# Altium PCB pcb.PcbDoc (part 1 of 2)
Units mil, origin at the board's own origin, x right, y up, seen from the top; angles counter-clockwise.
Board outline 2362.2 x 2507.87 mil, 4 copper layers (Top Layer, Internal Plane 1, MidLayer1, Bottom Layer); 87 components, 150 nets, 729 pads, 361 vias.
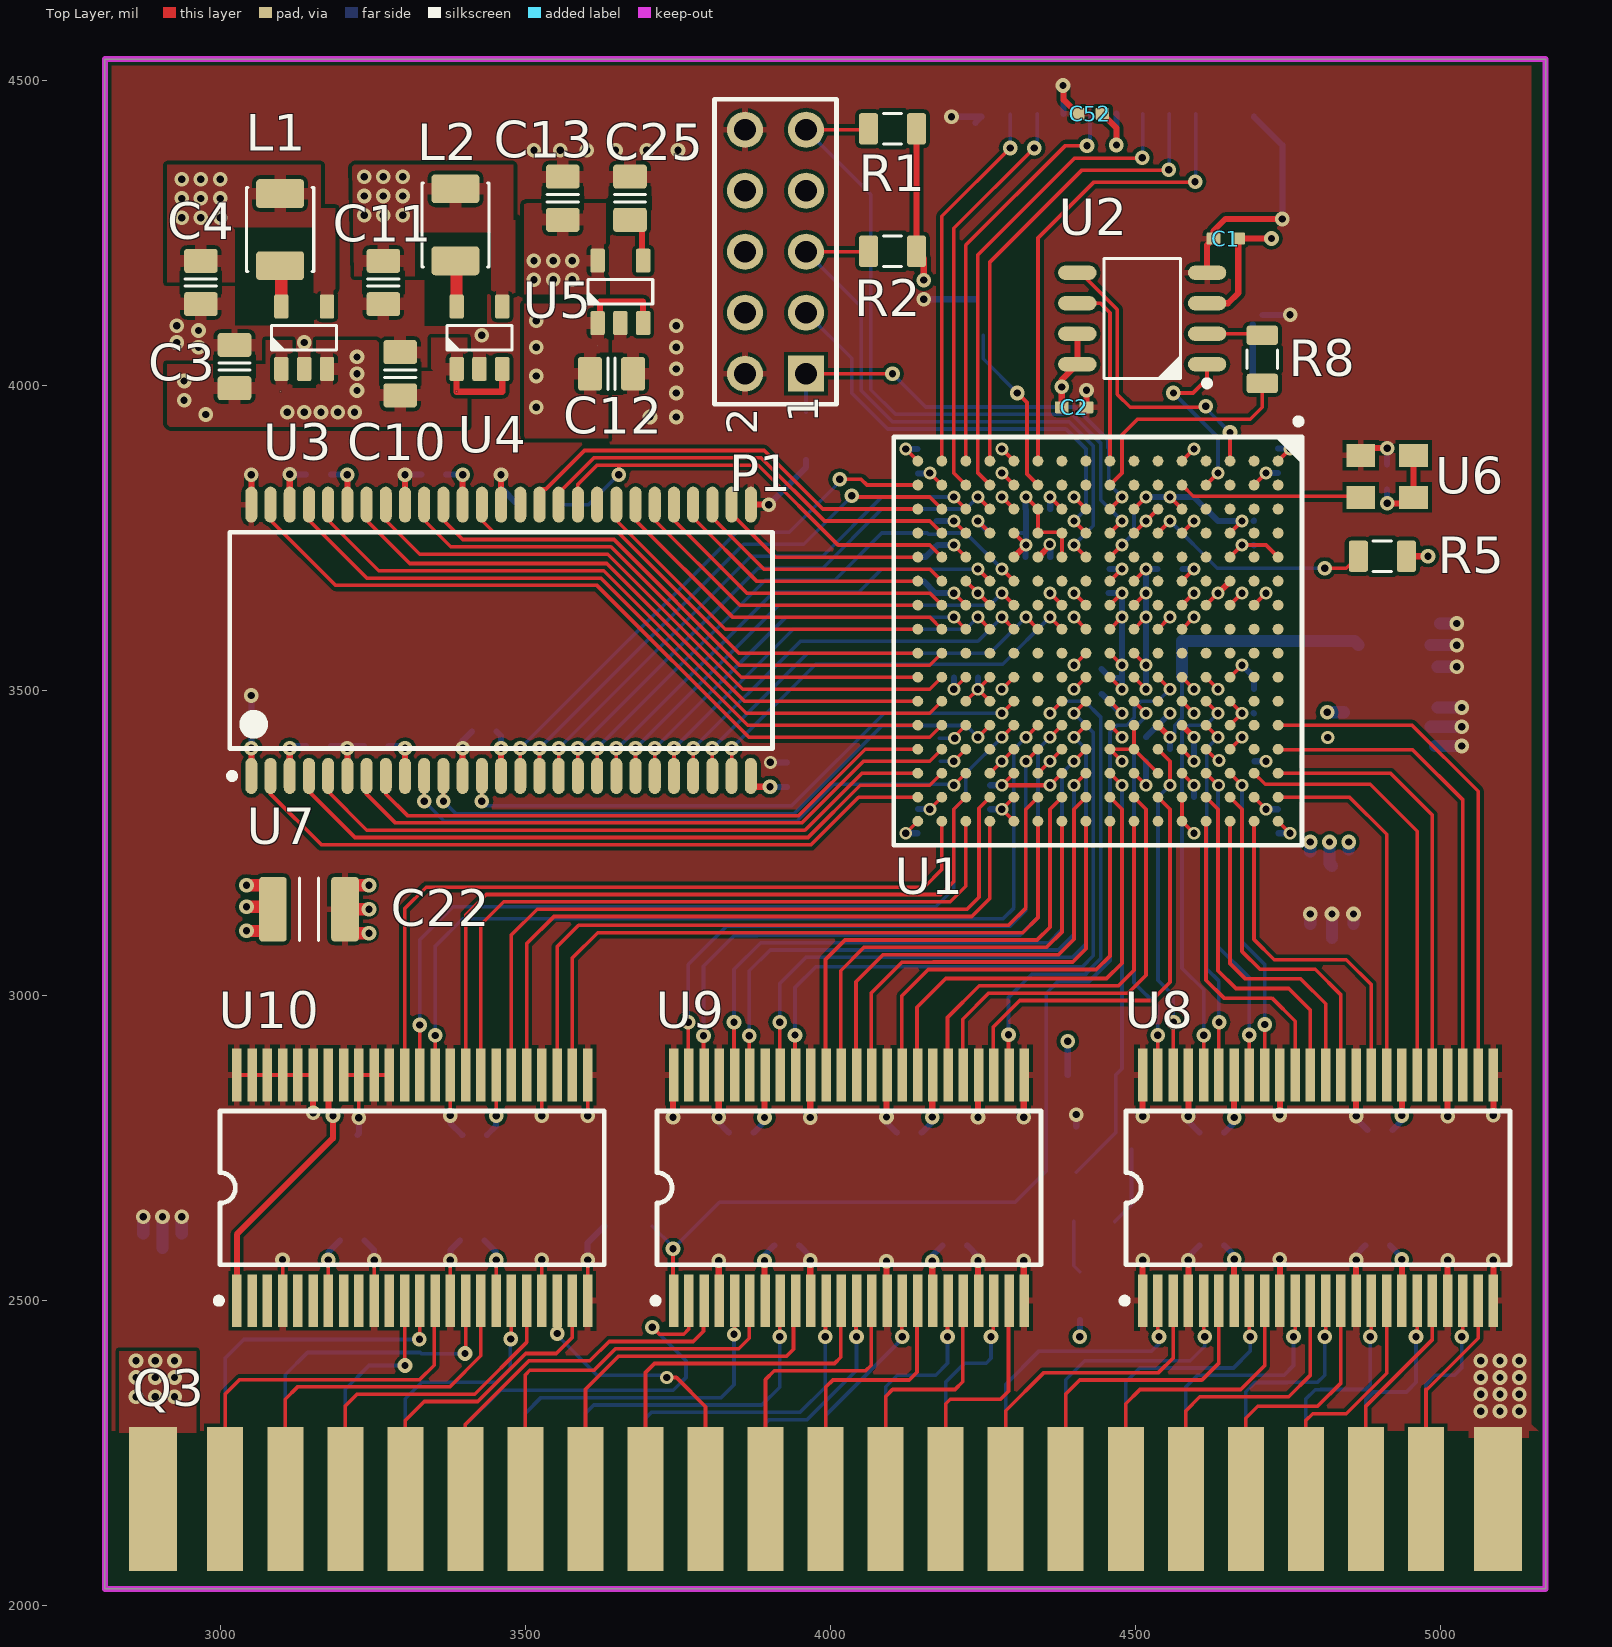
[diagram p0: Top Layer view]
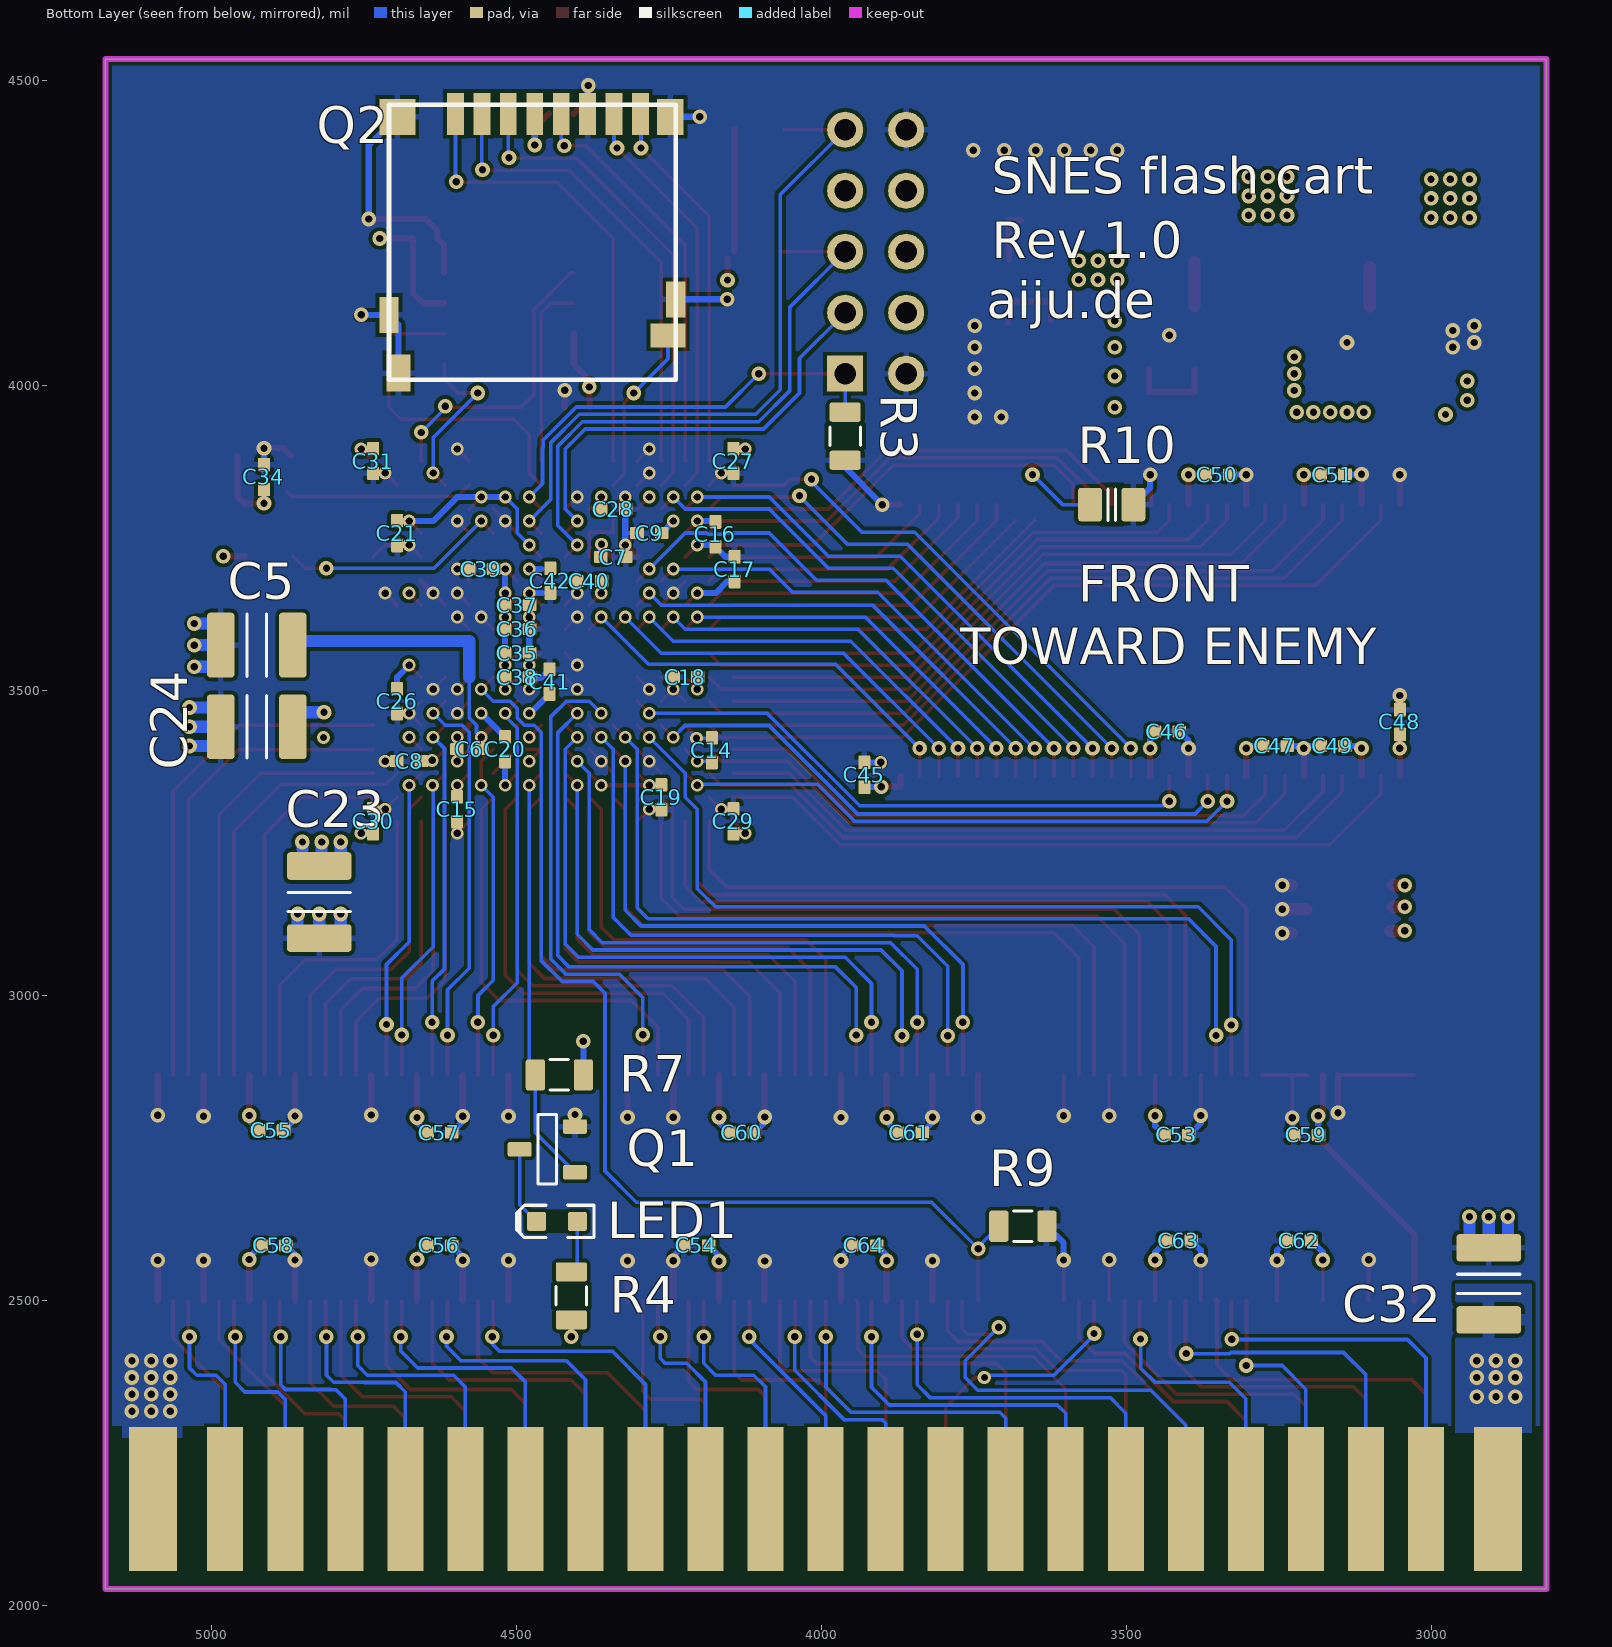
[diagram p1: Bottom Layer view, seen from below]
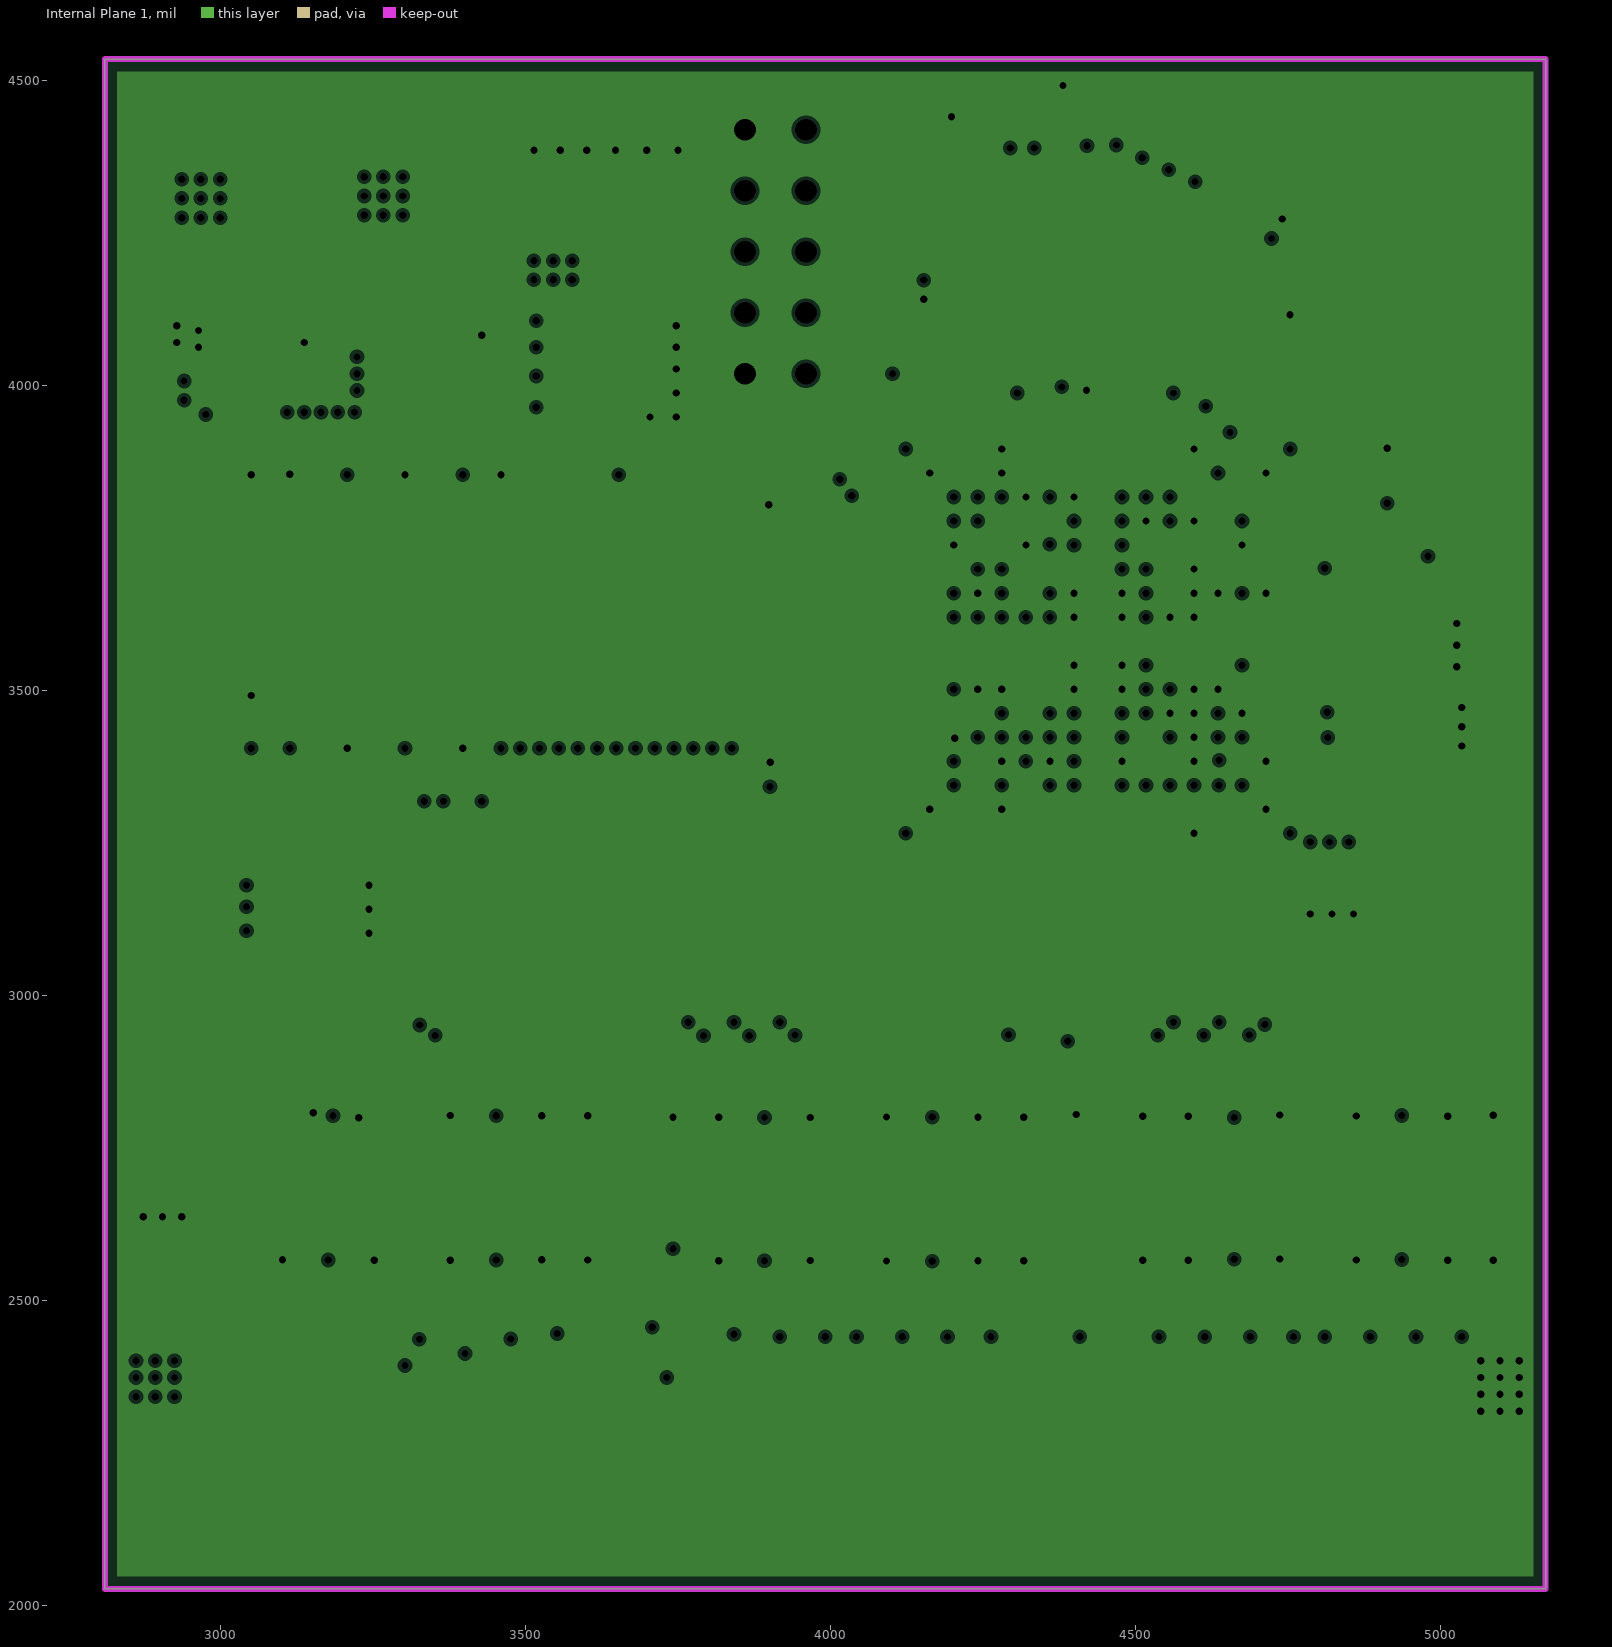
[diagram p2: Internal Plane 1, clearances drawn from the general rule]
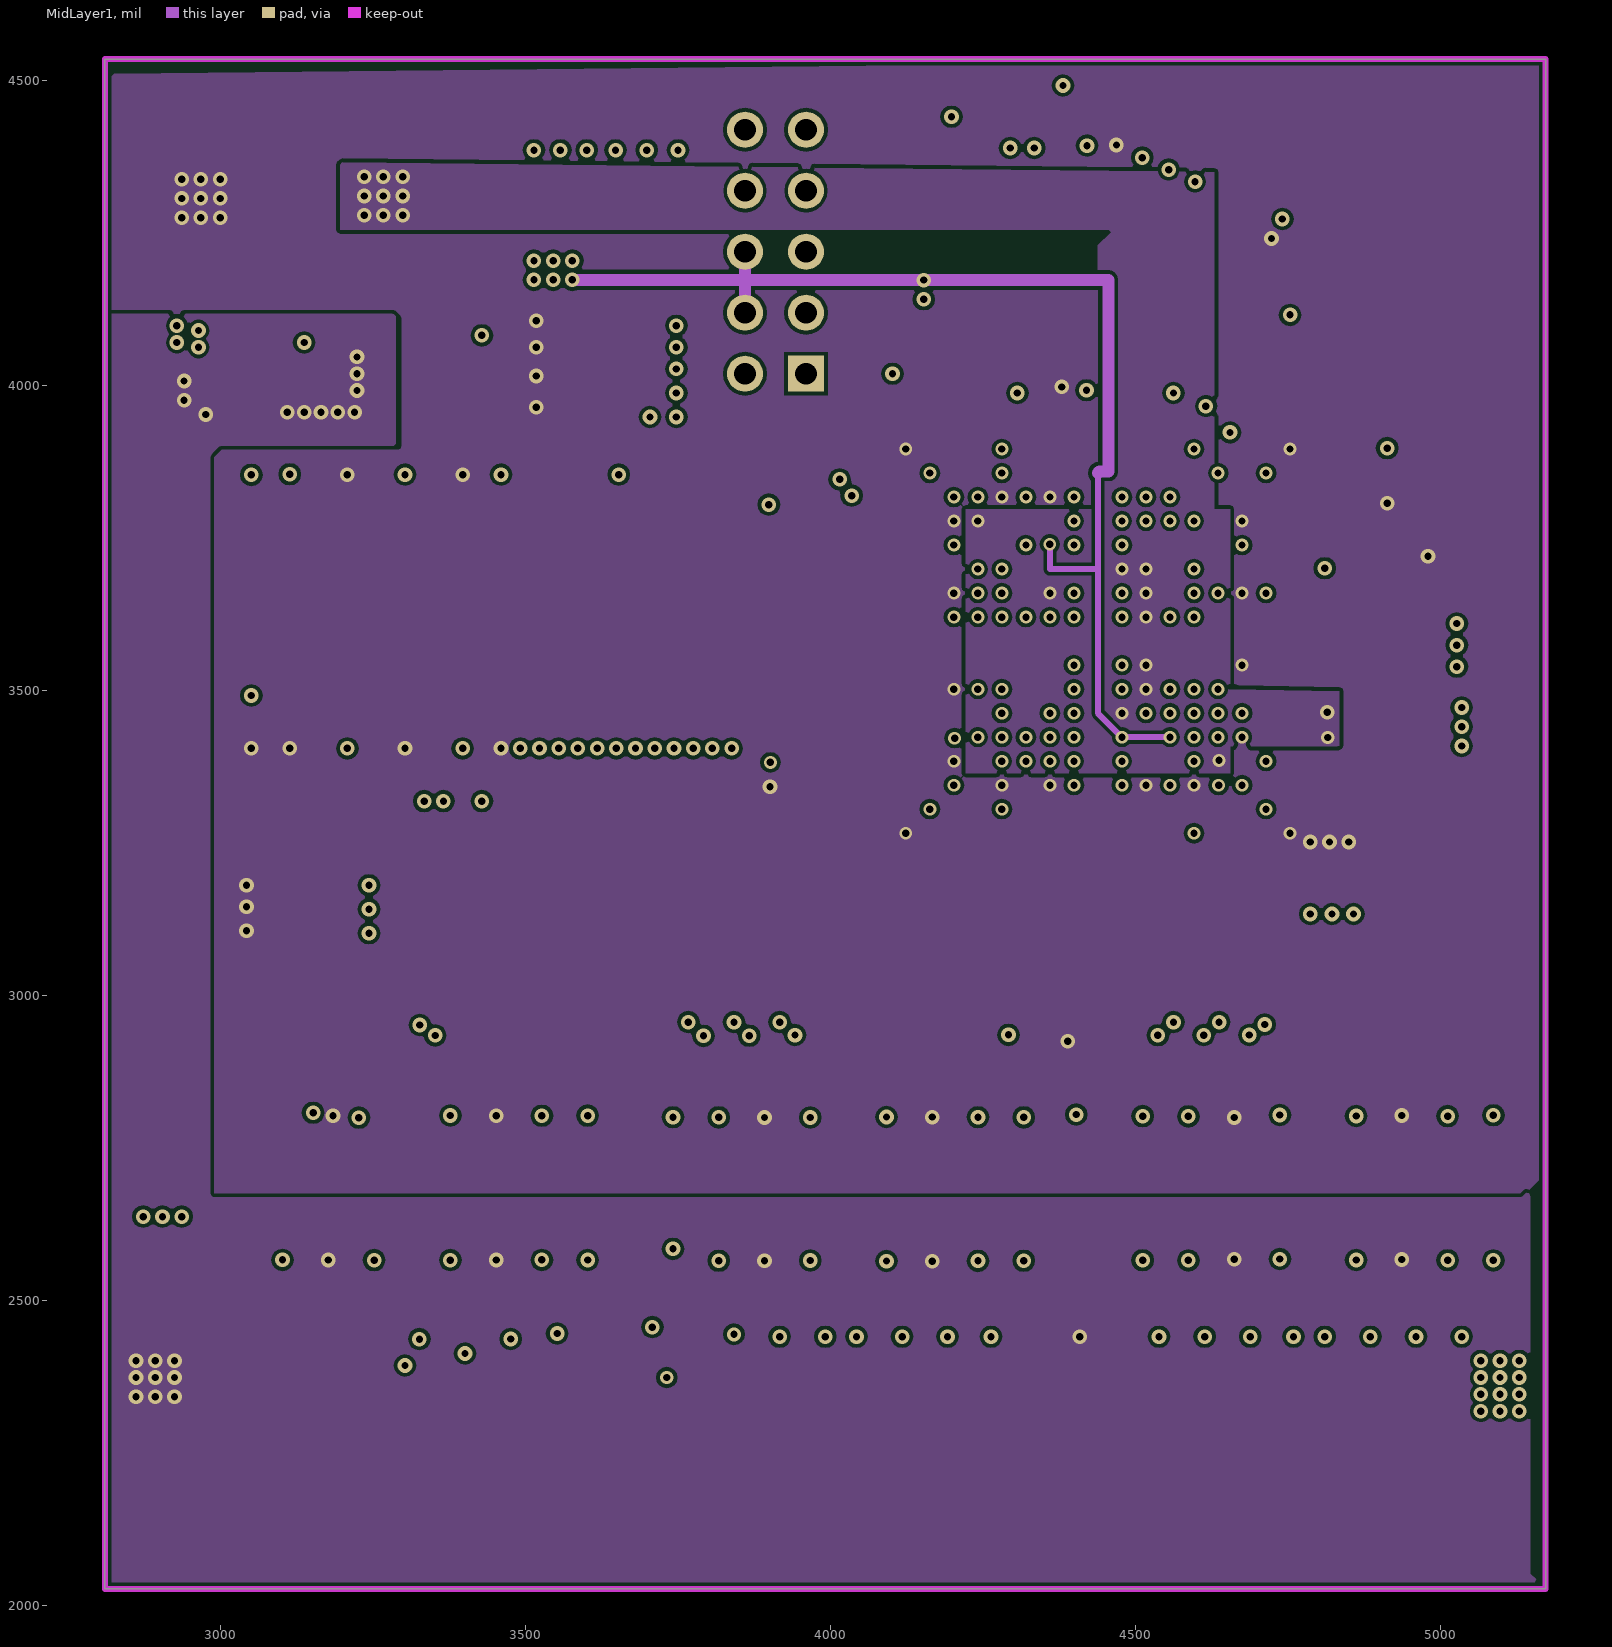
[diagram p3: MidLayer1]
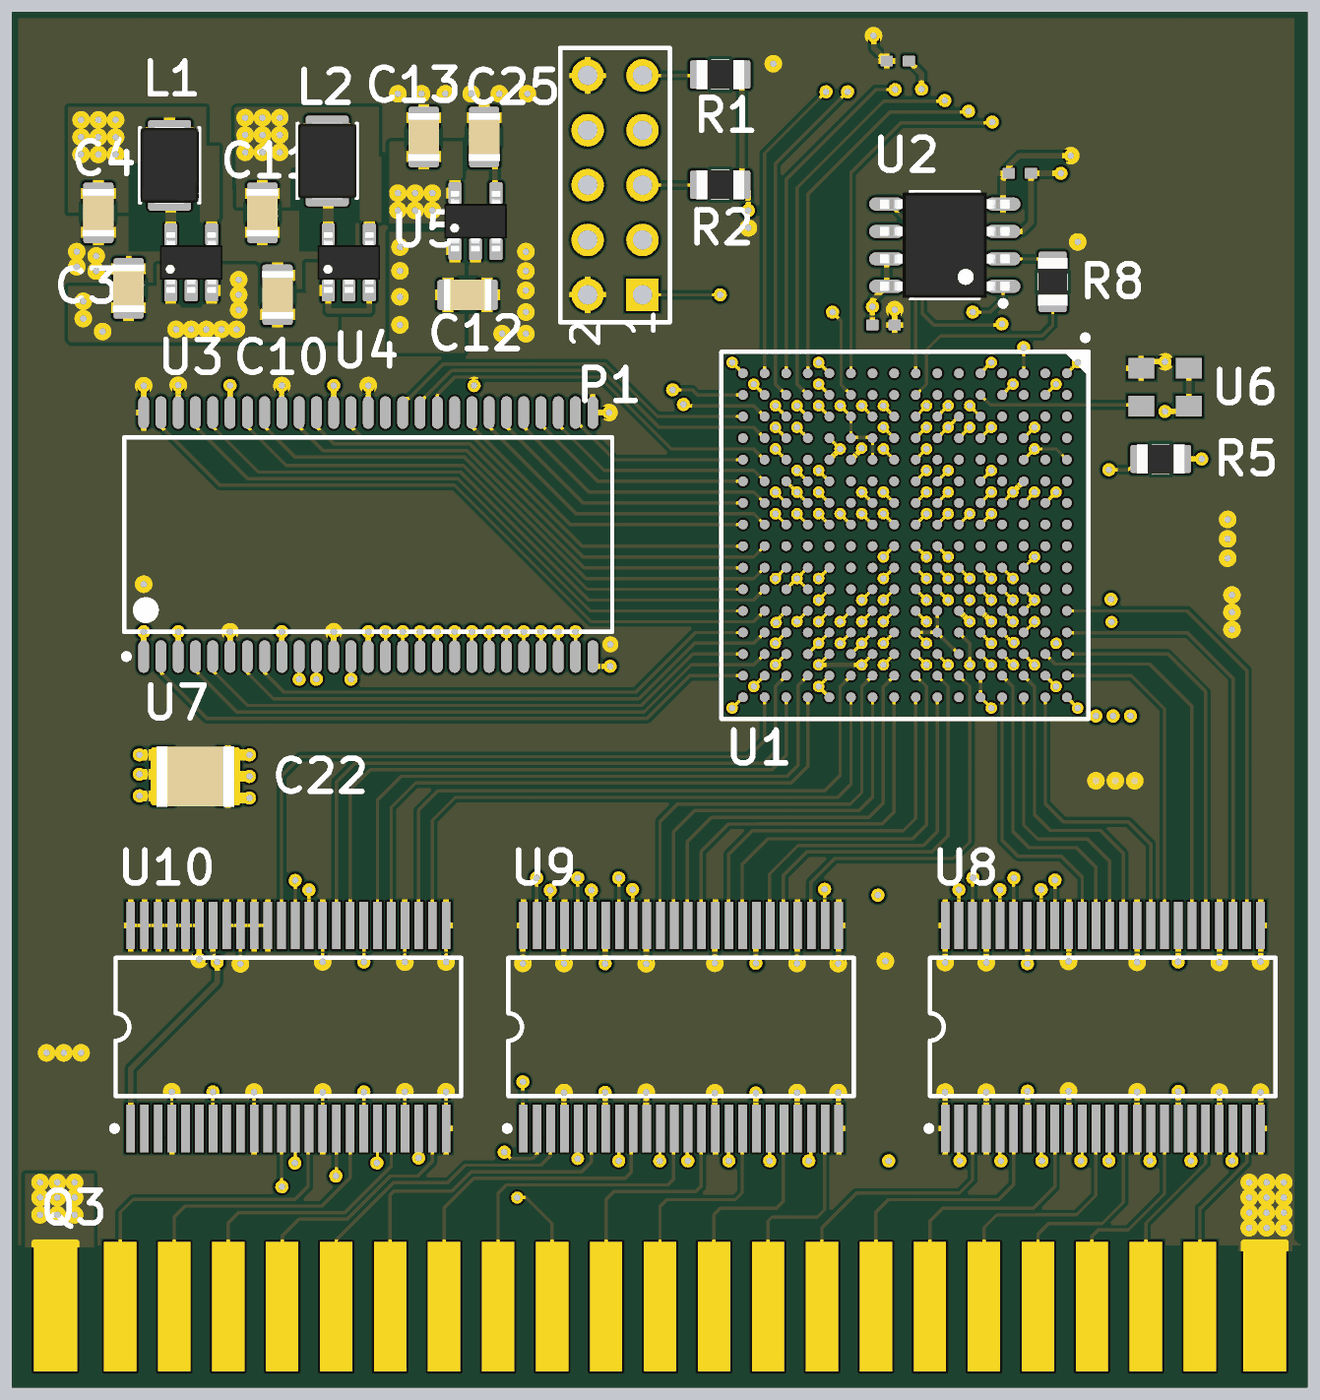
[diagram p5: 3D render of the assembled board from above, using the file's embedded part models]

## Layer stack, top to bottom
Top Layer: signal copper 1.4
Dielectric: prepreg 12.6, FR-4, Dk 4.8
Internal Plane 1: plane copper 1.4, net GND
Dielectric: core 12.6, FR-4, Dk 4.8
MidLayer1: signal copper 1.4
Dielectric: prepreg 12.6, FR-4, Dk 4.8
Bottom Layer: signal copper 1.4

## Board outline
2811.02,2027.56 2811.02,4535.43 5173.23,4535.43 5173.23,2027.56

## Design rules (kind name [scope] priority, off if disabled: settings)
Clearance [All] p1: gap=6
HoleSize [All] p1: absolutevalues=TRUE maxlimit=250 minlimit=12 maxpercent=80.000 minpercent=20.000
MinimumAnnularRing [All] p1: minimumring=4
MinimumSolderMaskSliver [All] p1: minsoldermaskwidth=4
PlaneClearance [All] p1: clearance=6
PlaneConnect [All] p1: planeconnectstyle=Relief reliefexpansion=6 reliefentries=4 reliefconductorwidth=6 reliefairgap=6
PolygonConnect PolygonConnect_1 [All vs IsVia] p1: component=Q3 connectstyle=Direct reliefconductorwidth=10 reliefentries=4 polygonreliefangle="90 Angle" airgapwidth=10
PolygonConnect [All] p2: connectstyle=Relief reliefconductorwidth=10 reliefentries=4 polygonreliefangle="90 Angle" airgapwidth=6
RoutingVias [All] p1: holewidth=12 width=24 viastyle="Through Hole" minholewidth=12 minwidth=21 maxholewidth=12 maxwidth=24
SilkToSolderMaskClearance SilkscreenOverComponentPads [IsPad] p1: minsilkscreentomaskgap=10 clearancetoexposedcopper=TRUE
SolderMaskExpansion [IsVia] p1: expansion=-999
SolderMaskExpansion SolderMaskExpansion_2 [Component=U7] p2: component=U10 expansion=2
SolderMaskExpansion SolderMaskExpansion_1 [All] p3: expansion=4
Width [All] p1: maxlimit=20 minlimit=6 preferedwidth=6
23 further rules are at their usual default settings.

## Classes and differential pairs
component class snesio: C53 C54 C55 C56 C57 C58 C59 C60 C61 C62 C63 C64 Q3 R9 U8 U9 U10
component class power: C3 C4 C5 C6 C7 C8 C9 C10 C11 C12 C13 C14 C15 C16 C17 C18 C19 C20 C21 C22 C23 C24 C25 C26 C27 C28 C29 C30 C31 C32 C34 C35 C36 C37 C38 C39 C40 C41 C42 C45 C46 C47 C48 C49 C50 C51 L1 L2 U3 U4 U5 U6
component class mem: C52 Q2 R10 U7
component class conf: C1 C2 LED1 P1 Q1 R1 R2 R3 R4 R5 R7 R8 U1 U2

## Components (designator, comment, footprint, x,y, rotation, side; value= is the part's Value field where it differs from the comment)
C1 "" CAPC1005X06L#1 4648.9,4241.29 r0 top
C2 "" CAPC1005X06L#1 4400.21,3964.65 r180 top
C3 "JMK212BJ106KD-T" CAPC2012X135N 3023.62,4031.5 r270 top
C4 "JMK212BJ106KD-T" CAPC2012X135N 2968.5,4169.29 r90 top
C5 "Cap Pol2" CAPC3225X220N 4925.2,3574.8 r0 bottom
C6 "" CAPC1005X06L#1 4577.01,3404.13 r180 bottom
C7 "" CAPC1005X06L#1 4340.79,3719.1 r0 bottom
C8 "" CAPC1005X06L#1 4675.43,3384.45 r180 bottom
C9 "" CAPC1005X06L#1 4281.73,3758.46 r180 bottom
C10 "JMK212BJ106KD-T" CAPC2012X135N 3295.28,4019.69 r270 top
C11 "JMK212BJ106KD-T" CAPC2012X135N 3267.72,4169.29 r90 top
C12 "JMK212BJ106KD-T" CAPC2012X135N 3641.73,4019.69 r180 top
C13 "JMK212BJ106KD-T" CAPC2012X135N 3561.76,4307.41 r270 top
C14 "" CAPC1005X06L#1 4179.21,3402.45 r270 bottom
C15 "" CAPC1005X06L#1 4596.69,3305.71 r90 bottom
C16 "" CAPC1005X06L#1 4173.31,3756.47 r90 bottom
C17 "" CAPC1005X06L#1 4141.62,3699.41 r270 bottom
C18 "" CAPC1005X06L#1 4222.68,3522.24 r180 bottom
C19 "" CAPC1005X06L#1 4262.05,3325.39 r90 bottom
C20 "" CAPC1005X06L#1 4517.95,3404.13 r270 bottom
C21 "" CAPC1005X06L#1 4695.12,3758.46 r90 bottom
C22 "Cap Pol2" CAPC3225X220N 3145.67,3141.73 r0 top
C23 "RESERVE" CAPC3225X220N 4822.83,3153.54 r270 bottom
C24 "Cap Pol2" CAPC3225X220N 4925.2,3440.95 r0 bottom
C25 "" CAPC2012X135N 3672,4307.41 r270 top
C26 "" CAPC1005X06L#1 4695.12,3482.87 r90 bottom
C27 "" CAPC1005X06L#1 4143.94,3876.57 r90 bottom
C28 "" CAPC1005X06L#1 4340.79,3797.83 r0 bottom
C29 "" CAPC1005X06L#1 4143.94,3286.02 r270 bottom
C30 "" CAPC1005X06L#1 4734.49,3286.02 r270 bottom
C31 "" CAPC1005X06L#1 4734.49,3876.57 r90 bottom
C32 "Cap Pol2" CAPC3225X220N 2905.51,2527.56 r90 bottom
C34 "" CAPC1005X06L#1 4913.39,3850.39 r270 bottom
C35 "" CAPC1005X06L#1 4498.27,3561.61 r0 bottom
C36 "" CAPC1005X06L#1 4498.27,3600.98 r0 bottom
C37 "" CAPC1005X06L#1 4498.27,3640.35 r0 bottom
C38 "" CAPC1005X06L#1 4498.27,3522.24 r0 bottom
C39 "" CAPC1005X06L#1 4557.32,3699.41 r180 bottom
C40 "" CAPC1005X06L#1 4380.16,3679.72 r180 bottom
C41 "" CAPC1005X06L#2 4445.2,3515.05 r270 bottom
C42 "" CAPC1005X06L#2 4443.97,3680.52 r90 bottom
C45 "" CAPC1005X06L#1 3929.13,3362.2 r270 bottom
C46 "" CAPC1005X06L#1 3433.07,3433.07 r0 bottom
C47 "" CAPC1005X06L#1 3255.91,3409.45 r0 bottom
C48 "" CAPC1005X06L#1 3051.18,3448.82 r270 bottom
C49 "" CAPC1005X06L#1 3161.42,3409.45 r180 bottom
C50 "" CAPC1005X06L#1 3350.39,3854.33 r0 bottom
C51 "" CAPC1005X06L#1 3161.42,3854.33 r0 bottom
C52 "" CAPC1005X06L#1 4426.18,4445.87 r0 top
C53 "" CAPC1005X06L#1 3417.32,2771.65 r0 bottom
C54 "" CAPC1005X06L#1 4204.72,2590.55 r180 bottom
C55 "" CAPC1005X06L#1 4901.57,2779.53 r0 bottom
C56 "" CAPC1005X06L#1 4625.98,2590.55 r0 bottom
C57 "" CAPC1005X06L#1 4625.98,2775.59 r0 bottom
C58 "" CAPC1005X06L#1 4897.64,2590.55 r0 bottom
C59 "" CAPC1005X06L#1 3204.72,2771.65 r180 bottom
C60 "" CAPC1005X06L#1 4129.92,2775.59 r0 bottom
C61 "" CAPC1005X06L#1 3854.33,2775.59 r0 bottom
C62 "" CAPC1005X06L#1 3216.54,2598.43 r180 bottom
C63 "" CAPC1005X06L#1 3413.39,2598.43 r0 bottom
C64 "" CAPC1005X06L#1 3929.13,2590.55 r180 bottom
L1 "1.2A" INDM3225X240N 3098.43,4255.91 r90 top
L2 "1.2A" INDM3225X240N 3385.83,4263.78 r90 top
LED1 "Green" LED-0603-GREEN 4433.07,2629.92 r0 bottom
P1 "JTAG" HDR2X5 3960.63,4019.68 r90 top
Q1 "BSS123" SOT23-3 4448.82,2748.03 r0 bottom
Q2 "HRS DM3D" "HRS DM3D" 4222.44,4480.31 r0 bottom locked
Q3 "SNES" SNES 2910,2175 r0 top locked
R1 "Res1" RESC2012X70N 4102.36,4421.26 r0 top
R2 "Res1" RESC2012X70N 4102.36,4220.47 r0 top
R3 "Res1" RESC2012X70N 3960.63,3917.32 r270 bottom
R4 "Res1" RESC2012X70N 4409.45,2507.87 r270 bottom
R5 "Res1" RESC2012X70N 4905.51,3720.47 r0 top
R7 "Res1" RESC2012X70N 4429.13,2870.08 r180 bottom
R8 "Res1" RESC2012X70N 4708.66,4043.31 r270 top
R9 "Res1" RESC2012X70N 3669.29,2622.05 r0 bottom
R10 "Res1" CAPC2012X135N 3523.62,3805.12 r0 bottom
U1 "EP3C5F256C8N" FBGA256-2 4439.21,3581.3 r270 top locked
U2 "EPCS4" SOIC127P600X175-8AN 4511.81,4110.24 r180 top
U3 "LM3671-3V3" SOT23-5 3137.8,4078.74 r90 top
U4 "LM3671-1V2" SOT23-5 3425.2,4078.74 r90 top
U5 "TC1015-2V5" SOT23-5 3656.25,4153.87 r90 top
U6 "KC3225A50.0000C30E00" KC3225A 4956.69,3885.83 r180 top
U7 "42S16400F" 54_TSOP2_400AF_N 3460.63,3582.68 r90 top locked
U8 "SN74ALVC164245DL" DL048 4800,2685 r0 top locked
U9 "SN74ALVC164245DL" DL048 4031,2685 r0 top locked
U10 "SN74ALVC164245DL" DL048 3315,2685 r0 top locked

## Footprints (in the part's own frame and the unit in brackets; to place one, negate y for a bottom-side part, rotate by r counter-clockwise, add the part's x,y. Pads: shape width x height; smd on the part's side, far side on the other; paste and mask are expansions set on the pad)
54_TSOP2_400AF_N [mm] "54-Pin Small Outline Package 0.8 mm Pitch, IPC Medium Density"
  oval 1.5x0.5 smd: 1(-5.65,10.4) 2(-5.65,9.6) 3(-5.65,8.8) 4(-5.65,8) 5(-5.65,7.2) 6(-5.65,6.4) 7(-5.65,5.6) 8(-5.65,4.8) 9(-5.65,4) 10(-5.65,3.2) 11(-5.65,2.4) 12(-5.65,1.6) 13(-5.65,0.8) 14(-5.65,0) 15(-5.65,-0.8) 16(-5.65,-1.6) 17(-5.65,-2.4) 18(-5.65,-3.2) 19(-5.65,-4) 20(-5.65,-4.8) 21(-5.65,-5.6) 22(-5.65,-6.4) 23(-5.65,-7.2) 24(-5.65,-8) 25(-5.65,-8.8) 26(-5.65,-9.6) 27(-5.65,-10.4) 28(5.65,-10.4) 29(5.65,-9.6) 30(5.65,-8.8) 31(5.65,-8) 32(5.65,-7.2) 33(5.65,-6.4) 34(5.65,-5.6) 35(5.65,-4.8) 36(5.65,-4) 37(5.65,-3.2) 38(5.65,-2.4) 39(5.65,-1.6) 40(5.65,-0.8) 41(5.65,0) 42(5.65,0.8) 43(5.65,1.6) 44(5.65,2.4) 45(5.65,3.2) 46(5.65,4) 47(5.65,4.8) 48(5.65,5.6) 49(5.65,6.4) 50(5.65,7.2) 51(5.65,8) 52(5.65,8.8) 53(5.65,9.6) 54(5.65,10.4)
  silkscreen extent -5.77,-11.3 4.5,11.32, body extent -5.08,-11.23 5.08,11.23, height 1.2
CAPC1005X06L#1 [mm] "Chip Capacitor, 2-Leads, Body 1,0x0,5mm, IPC High Density"
  rrect20% 0.57x0.5 smd: 1(-0.515,0) 2(0.515,0)
  body extent -0.55,-0.3 0.55,0.3, height 0.6
CAPC1005X06L#2 [mm] "Chip Capacitor, 2-Leads, Body 1,0x0,5mm, IPC High Density"
  rrect20% 0.57x0.5 smd mask+0.076: 1(-0.515,0) 2(0.515,0)
  body extent -0.55,-0.3 0.55,0.3, height 0.6
CAPC2012X135N [mm] "Chip Capacitor, Body 2.0x1.2mm, EIA 0805, IPC Medium Density"
  round 0.254 on Mech15: 0(0,0)
  rrect25% 1x1.4 smd: 1(-0.9,0) 2(0.9,0)
  Top Layer pour cut-out: -0.675,0.7 -0.475,0.9 0.475,0.9 0.675,0.7 0.675,-0.7 0.475,-0.9 -0.475,-0.9 -0.675,-0.7
  silkscreen extent -0.15,-0.65 0.15,0.65, body extent -1.1,-0.72 1.1,0.73, height 1.34
CAPC3225X220N [mm] "Chip Capacitor, Body 3.2x2.5mm, EIA 1210, IPC Medium Density"
  round 0.508 on Mech15: 0(0,0)
  rrect25% 1.15x2.7 smd paste-25.375: 1(-1.5,0) 2(1.5,0)
  silkscreen extent -0.4,-1.3 0.4,1.3, body extent -1.8,-1.4 1.8,1.4, height 2.19
DL048 [mm] "SSOP; 48 Leads; Body Width 7.5 mm; Pitch 0.635 mm"
  rect 0.4x2.2 smd: 1(-7.302,-4.7) 2(-6.667,-4.7) 3(-6.032,-4.7) 4(-5.397,-4.7) 5(-4.763,-4.7) 6(-4.127,-4.7) 7(-3.492,-4.7) 8(-2.857,-4.7) 9(-2.222,-4.7) 10(-1.587,-4.7) 11(-0.953,-4.7) 12(-0.318,-4.7) 13(0.318,-4.7) 14(0.953,-4.7) 15(1.587,-4.7) 16(2.222,-4.7) 17(2.857,-4.7) 18(3.492,-4.7) 19(4.127,-4.7) 20(4.763,-4.7) 21(5.397,-4.7) 22(6.032,-4.7) 23(6.667,-4.7) 24(7.302,-4.7) 25(7.302,4.7) 26(6.667,4.7) 27(6.032,4.7) 28(5.397,4.7) 29(4.763,4.7) 30(4.127,4.7) 31(3.492,4.7) 32(2.857,4.7) 33(2.222,4.7) 34(1.587,4.7) 35(0.953,4.7) 36(0.318,4.7) 37(-0.318,4.7) 38(-0.953,4.7) 39(-1.587,4.7) 40(-2.222,4.7) 41(-2.857,4.7) 42(-3.492,4.7) 43(-4.127,4.7) 44(-4.763,4.7) 45(-5.397,4.7) 46(-6.032,4.7) 47(-6.667,4.7) 48(-7.302,4.7)
  silkscreen extent -8.18,-4.82 8,3.2
FBGA256-2 [mm] "BGA, 256-Leads, Body 17x17mm, Pitch 1mm"
  round 0.45 smd: A1(-7.5,7.5) A2(-6.5,7.5) A3(-5.5,7.5) A4(-4.5,7.5) A5(-3.5,7.5) A6(-2.5,7.5) A7(-1.5,7.5) A8(-0.5,7.5) A9(0.5,7.5) A10(1.5,7.5) A11(2.5,7.5) A12(3.5,7.5) A13(4.5,7.5) A14(5.5,7.5) A15(6.5,7.5) A16(7.5,7.5) B1(-7.5,6.5) B2(-6.5,6.5) B3(-5.5,6.5) B4(-4.5,6.5) B5(-3.5,6.5) B6(-2.5,6.5) B7(-1.5,6.5) B8(-0.5,6.5) B9(0.5,6.5) B10(1.5,6.5) B11(2.5,6.5) B12(3.5,6.5) B13(4.5,6.5) B14(5.5,6.5) B15(6.5,6.5) B16(7.5,6.5) C1(-7.5,5.5) C2(-6.5,5.5) C3(-5.5,5.5) C4(-4.5,5.5) C5(-3.5,5.5) C6(-2.5,5.5) C7(-1.5,5.5) C8(-0.5,5.5) C9(0.5,5.5) C10(1.5,5.5) C11(2.5,5.5) C12(3.5,5.5) C13(4.5,5.5) C14(5.5,5.5) C15(6.5,5.5) C16(7.5,5.5) D1(-7.5,4.5) D2(-6.5,4.5) D3(-5.5,4.5) D4(-4.5,4.5) D5(-3.5,4.5) D6(-2.5,4.5) D7(-1.5,4.5) D8(-0.5,4.5) D9(0.5,4.5) D10(1.5,4.5) D11(2.5,4.5) D12(3.5,4.5) D13(4.5,4.5) D14(5.5,4.5) D15(6.5,4.5) D16(7.5,4.5) E1(-7.5,3.5) E2(-6.5,3.5) E3(-5.5,3.5) E4(-4.5,3.5) E5(-3.5,3.5) E6(-2.5,3.5) E7(-1.5,3.5) E8(-0.5,3.5) E9(0.5,3.5) E10(1.5,3.5) E11(2.5,3.5) E12(3.5,3.5) E13(4.5,3.5) E14(5.5,3.5) E15(6.5,3.5) E16(7.5,3.5) F1(-7.5,2.5) F2(-6.5,2.5) F3(-5.5,2.5) F4(-4.5,2.5) F5(-3.5,2.5) F6(-2.5,2.5) F7(-1.5,2.5) F8(-0.5,2.5) F9(0.5,2.5) F10(1.5,2.5) F11(2.5,2.5) F12(3.5,2.5) F13(4.5,2.5) F14(5.5,2.5) F15(6.5,2.5) F16(7.5,2.5) G1(-7.5,1.5) G2(-6.5,1.5) G3(-5.5,1.5) G4(-4.5,1.5) G5(-3.5,1.5) G6(-2.5,1.5) G7(-1.5,1.5) G8(-0.5,1.5) G9(0.5,1.5) G10(1.5,1.5) G11(2.5,1.5) G12(3.5,1.5) G13(4.5,1.5) G14(5.5,1.5) G15(6.5,1.5) G16(7.5,1.5) H1(-7.5,0.5) H2(-6.5,0.5) H3(-5.5,0.5) H4(-4.5,0.5) H5(-3.5,0.5) H6(-2.5,0.5) H7(-1.5,0.5) H8(-0.5,0.5) H9(0.5,0.5) H10(1.5,0.5) H11(2.5,0.5) H12(3.5,0.5) H13(4.5,0.5) H14(5.5,0.5) H15(6.5,0.5) H16(7.5,0.5) J1(-7.5,-0.5) J2(-6.5,-0.5) J3(-5.5,-0.5) J4(-4.5,-0.5) J5(-3.5,-0.5) J6(-2.5,-0.5) J7(-1.5,-0.5) J8(-0.5,-0.5) J9(0.5,-0.5) J10(1.5,-0.5) J11(2.5,-0.5) J12(3.5,-0.5) J13(4.5,-0.5) J14(5.5,-0.5) J15(6.5,-0.5) J16(7.5,-0.5) K1(-7.5,-1.5) K2(-6.5,-1.5) K3(-5.5,-1.5) K4(-4.5,-1.5) K5(-3.5,-1.5) K6(-2.5,-1.5) K7(-1.5,-1.5) K8(-0.5,-1.5) K9(0.5,-1.5) K10(1.5,-1.5) K11(2.5,-1.5) K12(3.5,-1.5) K13(4.5,-1.5) K14(5.5,-1.5) K15(6.5,-1.5) K16(7.5,-1.5) L1(-7.5,-2.5) L2(-6.5,-2.5) L3(-5.5,-2.5) L4(-4.5,-2.5) L5(-3.5,-2.5) L6(-2.5,-2.5) L7(-1.5,-2.5) L8(-0.5,-2.5) L9(0.5,-2.5) L10(1.5,-2.5) L11(2.5,-2.5) L12(3.5,-2.5) L13(4.5,-2.5) L14(5.5,-2.5) L15(6.5,-2.5) L16(7.5,-2.5) M1(-7.5,-3.5) M2(-6.5,-3.5) M3(-5.5,-3.5) M4(-4.5,-3.5) M5(-3.5,-3.5) M6(-2.5,-3.5) M7(-1.5,-3.5) M8(-0.5,-3.5) M9(0.5,-3.5) M10(1.5,-3.5) M11(2.5,-3.5) M12(3.5,-3.5) M13(4.5,-3.5) M14(5.5,-3.5) M15(6.5,-3.5) M16(7.5,-3.5) N1(-7.5,-4.5) N2(-6.5,-4.5) N3(-5.5,-4.5) N4(-4.5,-4.5) N5(-3.5,-4.5) N6(-2.5,-4.5) N7(-1.5,-4.5) N8(-0.5,-4.5) N9(0.5,-4.5) N10(1.5,-4.5) N11(2.5,-4.5) N12(3.5,-4.5) N13(4.5,-4.5) N14(5.5,-4.5) N15(6.5,-4.5) N16(7.5,-4.5) P1(-7.5,-5.5) P2(-6.5,-5.5) P3(-5.5,-5.5) P4(-4.5,-5.5) P5(-3.5,-5.5) P6(-2.5,-5.5) P7(-1.5,-5.5) P8(-0.5,-5.5) P9(0.5,-5.5) P10(1.5,-5.5) P11(2.5,-5.5) P12(3.5,-5.5) P13(4.5,-5.5) P14(5.5,-5.5) P15(6.5,-5.5) P16(7.5,-5.5) R1(-7.5,-6.5) R2(-6.5,-6.5) R3(-5.5,-6.5) R4(-4.5,-6.5) R5(-3.5,-6.5) R6(-2.5,-6.5) R7(-1.5,-6.5) R8(-0.5,-6.5) R9(0.5,-6.5) R10(1.5,-6.5) R11(2.5,-6.5) R12(3.5,-6.5) R13(4.5,-6.5) R14(5.5,-6.5) R15(6.5,-6.5) R16(7.5,-6.5) T1(-7.5,-7.5) T2(-6.5,-7.5) T3(-5.5,-7.5) T4(-4.5,-7.5) T5(-3.5,-7.5) T6(-2.5,-7.5) T7(-1.5,-7.5) T8(-0.5,-7.5) T9(0.5,-7.5) T10(1.5,-7.5) T11(2.5,-7.5) T12(3.5,-7.5) T13(4.5,-7.5) T14(5.5,-7.5) T15(6.5,-7.5) T16(7.5,-7.5)
  silkscreen extent -9.27,-8.5 8.5,8.5, body extent -8.5,-8.5 8.5,8.5, height 1.55
HDR2X5 [mm] "Connector; Header; 5x2 Position"
  rect 1.5x1.5 hole 0.9: 1(0,0)
  round 1.5 hole 0.9: 2(0,2.54) 3(2.54,0) 4(2.54,2.54) 5(5.08,0) 6(5.08,2.54) 7(7.62,0) 8(7.62,2.54) 9(10.16,0) 10(10.16,2.54)
  silkscreen extent -1.27,-1.27 11.43,3.81
"HRS DM3D" [mm]
  rect 0.7x1.75 smd paste-25.375: 1(9.575,0.875) 2(8.475,0.875) 3(7.375,0.875) 4(6.275,0.875) 5(5.175,0.875) 6(4.075,0.875) 7(2.975,0.875) 8(1.875,0.875)
  rect 1.45x1 smd paste-25.375 mask+0.076: CD1(0.725,10.1)
  rect 1x1.55 smd paste-25.375: CD2(11.95,11.675)
  rect 0.8x1.5 smd paste-25.375 mask+0.051: GND(0.4,8.6)
  rect 1.1x1.5 smd paste-25.375: GND(0.63,1)
  rect 1.5x1.5 smd paste-25.375: GND(12,1)
  rect 0.8x1.5 smd paste-25.375: GND(12.35,9.25)
  silkscreen extent 0.4,0.5 12.35,11.95
INDM3225X240N [mm] "Molded Inductor, 2-Leads, Body 3.2x2.5mm, IPC Medium Density"
  round 0.508 on Mech15: 0(0,0)
  rrect25% 1.2x2 smd: 1(-1.5,0) 2(1.5,0)
  silkscreen extent -1.75,-1.4 1.75,1.4, body extent -1.79,-1.35 1.79,1.35, height 2.4
KC3225A [mm]
  rect 1.2x0.95 smd: 1(0,0) 2(2.2,0) 3(2.2,1.75) 4(0,1.75)
LED-0603-GREEN [mm]
  round 0.254 on Mech15: 0(0,0)
  rrect25% 0.8x0.8 smd: A(-0.85,0) K(0.85,0)
  Top Layer pour cut-out: -0.5,0.5 0.5,0.5 0.5,-0.5 -0.5,-0.5
  silkscreen extent -1.55,-0.67 1.67,0.67, body extent -0.8,-0.4 0.8,0.4, height 0.75
RESC2012X70N [mm] "Chip Resistor, Body 2.0x1.2mm, EIA 0805, IPC Medium Density"
  round 0.254 on Mech15: 0(0,0)
  rrect25% 0.8x1.3 smd: 1(-1,0) 2(1,0)
  Top Layer pour cut-out: -0.725,0.65 -0.525,0.85 0.525,0.85 0.725,0.65 0.725,-0.65 0.525,-0.85 -0.525,-0.85 -0.725,-0.65
  silkscreen extent -0.38,-0.64 0.38,0.64, body extent -1.1,-0.67 1.1,0.68, height 0.69
SNES [mm]
  rect 2x6 smd far side paste-999: 5(55.5,0) 27(-0.5,0)
  rect 1.5x6 smd far side paste-999: 6(52.5,0) 7(50,0) 8(47.5,0) 9(45,0) 10(42.5,0) 11(40,0) 12(37.5,0) 13(35,0) 14(32.5,0) 15(30,0) 16(27.5,0) 17(25,0) 18(22.5,0) 19(20,0) 20(17.5,0) 21(15,0) 22(12.5,0) 23(10,0) 24(7.5,0) 25(5,0) 26(2.5,0)
  rect 2x6 smd paste-999: 36(55.5,0) 58(-0.5,0)
  rect 1.5x6 smd paste-999: 37(52.5,0) 38(50,0) 39(47.5,0) 40(45,0) 41(42.5,0) 42(40,0) 43(37.5,0) 44(35,0) 45(32.5,0) 46(30,0) 47(27.5,0) 48(25,0) 49(22.5,0) 50(20,0) 51(17.5,0) 52(15,0) 53(12.5,0) 54(10,0) 55(7.5,0) 56(5,0) 57(2.5,0)
SOIC127P600X175-8AN [mm] "SOIC, 8-Leads, Body 4.9x3.9mm, Pitch 1.27mm, IPC Medium Density"
  round 1 on Mech15: 0(0,0)
  oval 1.6x0.6 smd: 1(-2.7,1.905) 2(-2.7,0.635) 3(-2.7,-0.635) 4(-2.7,-1.905) 5(2.7,-1.905) 6(2.7,-0.635) 7(2.7,0.635) 8(2.7,1.905)
  silkscreen extent -2.83,-2.5 1.6,2.82, body extent -3,-2.45 3,2.45, height 1.75
SOT23-3 [mm] "SOT23, 3 pin"
  round 0.5 on Mech15: 0(0,0)
  rrect25% 1x0.6 smd: 1(-1.15,0.95) 2(-1.15,-0.95) 3(1.15,0)
  silkscreen extent -0.38,-1.45 0.38,1.45, body extent -1.4,-1.45 1.4,1.45, height 1.29
SOT23-5 [mm]
  round 0.5 on Mech15: 0(0,0)
  rrect25% 1x0.6 smd: 1(-1.3,0.95) 2(-1.3,0) 3(-1.3,-0.95) 4(1.3,-0.95) 5(1.3,0.95)
  silkscreen extent -0.51,-1.35 0.51,1.35, body extent -1.4,-1.45 1.4,1.45, height 1.44

## Part data
C1 C2 C3 C4 C6 C7 C8 C9 C10 C11 C12 C13 C14 C15 C16 C17 C18 C19 C20 C21 C25 C26 C27 C28 C29 C30 C31 C34 C35 C36 C37 C38 C39 C40 C41 C42 C45 C46 C47 C48 C49 C50 C51 C52 C53 C54 C55 C56 C57 C58 C59 C60 C61 C62 C63 C64: library part Cap, "Capacitor"
C5 C22 C24 C32: "Polarized Capacitor (Axial)"
C23: library part "Cap Pol2", "Polarized Capacitor (Axial)"
L1 L2: library part INDC_2u2_1210_1200mA, "Inductor 2.2uH 1.2A 1210 SMD chip"
LED1: library part LED_SMD_Green_0603_570nm, "LED 0603 SMD Green 570nm 50mcd 20mA"
P1: library part "Header 5X2", "Header, 5-Pin, Dual row"
Q1: library part MOSFET_BSS123, "MOSFET SMD N-CH 100V 170mA SOT23-3"
R1 R2 R3 R4 R5 R7 R8 R9 R10: "Resistor"
U1: "Cyclone III Family FPGA, 182 I/O Pins, 4 PLLs, 256-Pin FBGA, Speed Grade 8, Commercial Grade, Pb-Free"
U3 U4: library part LM3671
U5: library part TC1015
U6: library part osc
U7: library part 45S16400F
U8 U9 U10: "16-Bit 3.3-V to 5-V Level Shifting Transceiver with 3-State Outputs"

## Via types
v1: diameter 24, hole 12, Top Layer to Bottom Layer, 242 vias
v2: diameter 21, hole 12, Top Layer to Bottom Layer, 116 vias
v3: diameter 22, hole 12, Top Layer to Bottom Layer, 2 vias
v4: diameter 23, hole 12, Top Layer to Bottom Layer, 1 vias

## Nets (pads, with @x,y where several pads share a name; then routed paths per layer and width w, separated by ;. In a path a pad name is that pad's centre, name@x,y a point inside that pad or via, vN(x,y) a via of type N, cw(c..) or ccw(c..) an arc to the next point about the centre after c; other vN are vias at no path point)
1V2: C8.2 C9.2 C11.2 C24.1 C35.2 C36.2 C37.2 C38.2 C39.2 C40.2 C41.2 C42.2 L2.2 U1.D13 U1.G6 U1.G7 U1.G8 U1.G9 U1.G10 U1.H6 U1.H11 U1.K7 U1.N4 U4.4 | length 620.4
  Top Layer w6: v2(4242.36,3778.15) U1.N4@4262.05,3758.47 ; v2(4360.47,3660.04) U1.K7@4380.16,3640.36 ; U1.H11@4458.9,3482.87 v2(4478.58,3463.19) ; U1.H6@4458.9,3679.73 v2(4478.58,3699.41) ; U1.G10@4498.27,3522.24 v2(4517.95,3502.56) ; U1.G9@4498.27,3561.61 v2(4517.95,3541.93) ; U1.G8@4498.27,3600.98 v2(4517.95,3620.67) ; U1.G7@4498.27,3640.36 v2(4517.95,3660.04) ; U1.G6@4498.27,3679.73 v2(4517.95,3699.41) ; U1.D13@4616.38,3404.13 4636.06,3384.45 4637.44,3385.82 v2(4637.79,3385.82)
  Bottom Layer w10: v2@4242.36,3777.56 C9.2@4261.46,3758.46 ; C41.2@4445.2,3494.77 4476.79,3463.19 v2(4478.58,3463.19) ; 4458.1,3699.41 v2(4478.58,3699.41) ; v2(4517.95,3502.56) v2(4517.95,3541.93) v2(4517.95,3620.67) v2(4517.95,3660.04) v2(4517.95,3699.41) C39.2@4537.05,3699.41 ; v2@4636.07,3384.45 4637.44,3385.82 v2(4637.79,3385.82)
  Bottom Layer w20: v1(4814.96,3464.57) 4842.52,3464.57
  other v1: 3236.22,4279.53 3267.72,4279.53 3299.21,4279.53 3236.22,4311.02 3267.72,4311.02 3299.21,4311.02 3236.22,4342.52 3267.72,4342.52 3299.21,4342.52
  other v3: 4815.83,3423.28
2V5: C5.1 C6.2 C7.2 C13.2 P1.4 P1.6 R1.2 R2.2 U1.F12 U1.H12 U1.L5 U5.5 | length 2778
  Top Layer w6: U1.H12@4458.9,3443.5 v2(4478.58,3423.82)
  Top Layer w10: R2.2@4141.73,4220.47 R1.2@4141.73,4421.26 ; v1(4153.54,4173.23) R2.2@4153.54,4208.66 ; U1.L5@4340.79,3719.1 4341.14,3719.1 v2@4362.2,3740.15 ; U1.F12@4537.64,3443.5 v2(4557.32,3423.82)
  MidLayer1 w10: v2@4362.2,3740.15 4360.47,3738.43 4360.47,3699.41 4439.21,3699.41 ; 4439.21,3856.89 4439.21,3699.41 ; v2(4557.32,3423.82) v2(4478.58,3423.82) 4439.21,3463.19 4439.21,3699.41
  MidLayer1 w20: v1(3577.51,4173.55) 3860.63,4173.55 ; P1.4@3860.63,4119.69 3860.63,4173.55 ; P1.6@3860.63,4219.69 3860.63,4173.55 ; 4439.21,3856.89 4441.74,3859.42 4456.37,3859.42 4456.37,4173.55 3860.63,4173.55
  Bottom Layer w6: v2(4557.32,3423.82) 4565.01,3431.5 4565.01,3443.3 4577.01,3455.3 4577.01,3522.24
  Bottom Layer w10: C7.2@4361.06,3719.1 v2@4361.06,3739.02 ; C6.2@4557.32,3404.73 v2(4557.32,3423.82)
  Bottom Layer w20: 4577.01,3522.24 4577.01,3581.3 4859.65,3581.3 C5.1@4866.14,3574.8
  other v1: 3514.52,4173.55 3546.01,4173.55 3514.52,4205.05 3546.01,4205.05 3577.51,4205.05
  other v2: 4360.2,3740.15
3V3: C1.2 C2.2 C4.2 C12.2 C14.2 C15.2 C16.2 C17.2 C18.2 C19.2 C20.2 C21.2 C22.1 C23.1 C26.2 C27.2 C28.2 C29.2 C30.2 C31.2 C34.2 C45.2 C46.2 C47.2 C48.2 C49.2 C50.2 C51.2 C52.2 C53.2 C55.2 C57.2 C59.2 C60.2 C61.2 L1.2 Q2.4 R5.2 R7.2 U1.A1 U1.A16 U1.C4 U1.C7 U1.C10 U1.C13 U1.E3 U1.E14 U1.G3 U1.G14 U1.H5 U1.K3 U1.K14 U1.M3 U1.M14 U1.P4 U1.P7 U1.P10 U1.P13 U1.T1 U1.T16 U2.3 U2.7 U2.8 U3.4 U5.1 U5.3 U6.1 U6.4 U7.1 U7.3 U7.9 U7.14 U7.27 U7.43 U7.49 U8.31 U8.42 U9.31 U9.42 U10.1 U10.31 U10.42 | length 3718.4
  Top Layer w6: v1(3452.5,2803.41) U10.31@3452.5,2870.04 ; v2(4124.25,3266.34) U1.T16@4143.94,3286.02 ; v2(4124.25,3896.26) U1.T1@4143.94,3876.58 ; v2(4202.99,3384.45) U1.P13@4222.68,3404.13 ; v2(4202.99,3502.56) U1.P10@4222.68,3522.24 ; v2(4202.99,3660.04) U1.P7@4222.68,3640.36 ; v2(4202.99,3778.15) U1.P4@4222.68,3758.47 ; v2(4281.73,3345.08) U1.M14@4301.42,3364.76 ; v2(4281.73,3817.52) U1.M3@4301.42,3797.84 ; v2(4360.47,3345.08) U1.K14@4380.16,3364.76 ; v2(4360.47,3817.52) U1.K3@4380.16,3797.84 ; U1.H5@4458.9,3719.1 v2(4478.58,3738.78) ; U1.G14@4498.27,3364.76 v2(4517.95,3345.08) ; U1.G3@4498.27,3797.84 v2(4517.95,3817.52) ; v2(4557.32,3817.52) U1.E3@4577.01,3797.84 ; U1.E14@4577.01,3364.76 v2(4596.69,3345.08) ; U1.C13@4655.75,3404.13 v2(4675.43,3423.82) ; U1.C10@4655.75,3522.24 v2(4675.43,3541.93) ; U1.C7@4655.75,3640.36 v2(4675.43,3660.04) ; U1.C4@4655.75,3758.47 v2(4675.43,3778.15) ; U1.A16@4734.49,3286.02 v2(4754.17,3266.34) ; U1.A1@4734.49,3876.58 v2(4754.17,3896.26)
  Top Layer w8: v2(4281.73,3345.08) v2(4360.47,3345.08)
  Top Layer w10: U10.1@3027.5,2499.96 3027.5,2608.61 3185.03,2766.15 v1(3185.03,2803.14) 3177.5,2810.68 U10.42@3177.5,2870.04 ; U7.1@3051.18,3360.24 v1(3051.18,3405.51) ; L1.2@3098.43,4314.96 L1.2@3100.39,4312.99 ; U7.3@3114.17,3360.24 v1(3114.17,3405.51) ; U7.49@3208.66,3805.12 v1(3208.66,3854.33) ; U7.9@3303.15,3360.24 v1(3303.15,3405.51) ; U7.43@3397.64,3805.12 v1(3397.64,3854.33) ; U7.14@3460.63,3360.24 v1(3460.63,3405.51) ; U5.1@3623.08,4106.92 3623.08,4137.78 3693.65,4137.78 U5.3@3693.65,4102.68 ; U7.27@3870.08,3360.24 3870.08,3342.52 v1@3897.64,3342.52 ; v1(3892.5,2800.41) U9.42@3892.5,2870.04 ; v1(4167.5,2801) U9.31@4167.5,2870.04 ; C2.2@4379.93,3964.65 v1(4379.93,3998.08) 4379.93,4009.66 U2.8@4405.51,4035.24 U2.7@4405.51,4085.24 ; C52.2@4446.46,4445.87 4469.49,4422.83 v1(4469.49,4394.61) ; U2.3@4618.11,4135.24 4652.42,4135.24 4669.18,4152 C1.2@4669.18,4241.29 v1(4723.63,4241.29) ; v1(4662.5,2800.3) U8.42@4662.5,2870.04 ; v1(4913.39,3807.09) 4946.85,3807.09 U6.4@4956.69,3816.93 U6.1@4956.69,3885.83 ; v1(4937.5,2803.64) U8.31@4937.5,2870.04 ; R5.2@4944.88,3720.47 v1(4980.31,3720.47)
  Top Layer w20: v1(3043.31,3106.3) C22.1@3066.93,3106.3 ; v1(3043.31,3145.67) 3062.99,3145.67 ; v1(3043.31,3181.1) 3062.99,3181.1
  Bottom Layer w6: v1(3452.5,2803.41) v1@3452.76,2803.15 ; C14.2@4180.9,3384.45 v2(4202.99,3384.45) ; v2@4202.73,3660.3 v2(4202.99,3660.04) ; v2@4202.99,3501.25 v2(4202.99,3502.56) ; v2@4281.73,3342.02 v2(4281.73,3345.08) ; v2(4478.58,3738.78) 4498.27,3758.46 4498.27,3797.83 v2(4517.95,3817.52)
  Bottom Layer w10: v1(3051.18,3405.51) C48.2@3051.18,3428.54 ; v1@3118.11,3409.45 C49.2@3141.14,3409.45 ; C51.2@3181.69,3854.33 v1(3208.66,3854.33) ; C59.2@3185.03,2772.24 v1(3185.03,2803.14) ; C47.2@3276.18,3409.45 3299.21,3409.45 v1(3303.15,3405.51) ; C50.2@3370.67,3854.33 v1(3397.64,3854.33) ; C53.2@3437.6,2771.65 3452.5,2786.56 v1(3452.5,2803.41) ; C46.2@3453.35,3433.07 3460.63,3425.79 v1(3460.63,3405.51) ; C61.2@3874.61,2775.59 3892.5,2793.48 v1(3892.5,2800.41) ; v1@3902.17,3341.93 C45.2@3929.13,3341.93 ; v2(4124.25,3266.34) C29.2@4143.35,3266.34 ; v2(4124.25,3896.26) C27.2@4143.35,3896.26 ; C17.2@4143.62,3679.13 4153.62,3679.13 4172.71,3660.04 v2(4202.99,3660.04) ; C60.2@4150.2,2775.59 v1@4167.5,2792.89 ; C16.2@4174.72,3778.15 v2(4202.99,3778.15) ; v2(4202.99,3502.56) C18.2@4202.99,3521.66 ; C19.2@4262.64,3345.08 v2(4281.73,3345.08) ; C28.2@4361.06,3797.83 v2@4361.06,3816.93 ; R7.2@4389.76,2870.08 v1(4389.76,2925.2) ; v1(4469.49,4394.61) Q2.4@4469.49,4445.87 ; v2(4517.95,3345.08) C20.2@4517.95,3383.86 ; v2(4517.95,3817.52) v2(4557.32,3817.52) 4596.69,3817.52 4636.06,3778.15 v2(4675.43,3778.15) ; C15.2@4596.69,3325.98 v2(4596.69,3345.08) ; C57.2@4646.26,2775.59 4662.5,2791.83 v1(4662.5,2800.3) ; v2(4675.43,3541.93) 4695.12,3522.24 C26.2@4695.12,3503.15 ; C21.2@4694.53,3778.15 C21.2@4695.12,3778.74 ; C31.2@4734.49,3896.85 v2@4753.59,3896.85 ; C30.2@4735.08,3266.34 v2(4754.17,3266.34) ; v1(4913.39,3807.09) C34.2@4913.39,3830.12 ; C55.2@4921.85,2779.53 4937.5,2795.18 v1(4937.5,2803.64)
  Bottom Layer w20: 4787.4,3236.22 v1(4787.4,3251.97) ; v1(4818.9,3251.97) 4818.9,3216.54 C23.1@4822.83,3212.6 ; v1@4850.39,3240.16 v1(4850.39,3251.97)
  other v1: 3901.57,3342.52 3518.45,3964.89 3518.45,4016.07 3518.45,4063.32 3518.45,4106.62 2937.01,4275.59 2968.5,4275.59 3000,4275.59 2937.01,4307.09 2968.5,4307.09 3000,4307.09 2937.01,4338.58 2968.5,4338.58 3000,4338.58
5V: C3.2 C10.2 C32.1 C54.2 C56.2 C58.2 C62.2 C63.2 C64.2 Q3.27 Q3.58 R4.2 U3.1 U3.3 U4.1 U4.3 U8.7 U8.18 U9.7 U9.18 U10.7 U10.18 | length 780.7
  Top Layer w6: U10.7@3177.5,2499.96 v1(3177.5,2566.59) ; U10.18@3452.5,2499.96 v1(3452.5,2566.67)
  Top Layer w10: U4.1@3387.8,4027.56 3387.79,3990.16 3462.6,3990.16 U4.3@3462.6,4027.56 ; U9.7@3892.5,2499.96 v1(3892.5,2565.73) ; U9.18@4167.5,2499.96 v1(4167.5,2564.78) ; U8.7@4662.5,2499.96 v1(4662.5,2568.01) ; U8.18@4937.5,2499.96 v1(4937.5,2567.42)
  Bottom Layer w6: v1(3177.5,2566.59) 3177.5,2579.67
  Bottom Layer w10: 3177.5,2579.67 C62.2@3196.26,2598.43 ; C63.2@3433.66,2598.43 3452.5,2579.59 v1(3452.5,2566.67) ; v1(3892.5,2565.73) 3892.5,2574.19 C64.2@3908.86,2590.55 ; v1(4167.5,2564.78) 4167.5,2573.6 C54.2@4184.45,2590.55 ; v1(4409.45,2440.94) R4.2@4409.45,2468.5 ; C56.2@4646.26,2590.55 4662.5,2574.31 v1(4662.5,2568.01) ; C58.2@4917.91,2590.55 4937.5,2570.96 v1(4937.5,2567.42)
  other v1: 2862.2,2342.52 2893.7,2342.52 2925.2,2342.52 2862.2,2374.02 2893.7,2374.02 2925.2,2374.02 2862.2,2401.57 2893.7,2401.57 2925.2,2401.57 2976.38,3952.76 3110.24,3956.69 3137.8,3956.69 3165.35,3956.69 3192.91,3956.69 3220.47,3956.69 2940.95,3976.38 3224.41,3992.13 2940.95,4007.87 3224.41,4019.69 3224.41,4047.24
A0: Q3.17 U9.13 | length 423.6
  Top Layer w6: U9.13@4042.5,2499.96 4042.5,2441.75 v1(4043.31,2440.94)
  Bottom Layer w6: Q3.17@3894.25,2175 3894.25,2299.2 3900.11,2305.06 3962.54,2305.06 4043.31,2385.83 v1(4043.31,2440.94)
A1: Q3.16 U9.16 | length 377.2
  Top Layer w6: U9.16@4117.5,2499.96 4117.5,2441.56 v1(4118.11,2440.94)
  Bottom Layer w6: Q3.16@3992.68,2175 3992.68,2311.57 4118.11,2437.01 v1(4118.11,2440.94)
A2: Q3.15 U9.19 | length 403.9
  Top Layer w6: v1(4192.5,2440.94) U9.19@4192.5,2499.96
  Bottom Layer w6: Q3.15@4091.1,2175 4091.1,2358.82 4110.24,2377.95 4173.23,2377.95 4192.5,2397.22 v1(4192.5,2440.94)
A3: Q3.14 U9.22 | length 378
  Top Layer w6: v1(4263.78,2440.94) 4267.5,2444.67 U9.22@4267.5,2499.96
  Bottom Layer w6: Q3.14@4189.53,2175 4189.53,2366.69 4220.47,2397.64 4255.91,2397.64 4263.78,2405.51 v1(4263.78,2440.94)
A4: Q3.13 U8.2 | length 538.3
  Top Layer w6: U8.2@4537.5,2499.96 4537.5,2442.82 v1(4539.37,2440.94)
  Bottom Layer w6: Q3.13@4287.95,2175 4287.95,2362.76 4342.52,2417.32 4527.56,2417.32 4539.37,2429.13 v1(4539.37,2440.94)
A5: Q3.12 U8.5 | length 521.4
  Top Layer w6: U8.5@4612.5,2499.96 4612.5,2442.62 v1(4614.17,2440.94)
  Bottom Layer w6: Q3.12@4386.38,2175 4386.38,2370.44 4417.51,2401.57 4590.55,2401.57 4614.17,2425.2 v1(4614.17,2440.94)
A6: Q3.11 U8.8 | length 500
  Top Layer w6: U8.8@4687.5,2499.96 4687.5,2442.42 v1(4688.98,2440.94)
  Bottom Layer w6: Q3.11@4484.8,2175 4484.8,2366.5 4507.87,2389.57 4595.52,2389.57 4595.71,2389.76 4661.42,2389.76 4688.98,2417.32 v1(4688.98,2440.94)
A7: Q3.10 U8.11 | length 482.1
  Top Layer w6: v1(4759.84,2440.94) 4762.5,2443.6 U8.11@4762.5,2499.96
  Bottom Layer w6: Q3.10@4583.23,2175 4583.23,2358.63 4602.36,2377.76 4666.39,2377.76 4666.58,2377.95 4744.09,2377.95 4759.84,2393.7 v1(4759.84,2440.94)
A8: Q3.9 U8.13 | length 439
  Top Layer w6: v1(4811.02,2440.94) 4812.5,2442.42 U8.13@4812.5,2499.96
  Bottom Layer w6: Q3.9@4681.65,2175 4681.65,2350.76 4696.85,2365.95 4749.06,2365.95 4749.25,2366.14 4799.21,2366.14 4811.02,2377.95 v1(4811.02,2440.94)
A9: Q3.8 U8.16 | length 417.8
  Top Layer w6: v1(4885.83,2440.94) 4887.5,2442.62 U8.16@4887.5,2499.96
  Bottom Layer w6: Q3.8@4780.08,2175 4780.08,2338.94 4795.28,2354.14 4804.18,2354.14 4804.37,2354.33 4877.95,2354.33 4885.83,2362.2 v1(4885.83,2440.94)
A10: Q3.7 U8.19 | length 391.3
  Top Layer w6: v1(4960.63,2440.94) 4962.5,2442.82 U8.19@4962.5,2499.96
  Bottom Layer w6: Q3.7@4878.5,2175 4878.5,2337.91 4890.99,2350.39 4944.88,2350.39 4960.63,2366.14 v1(4960.63,2440.94)
A11: Q3.6 U8.22 | length 368.5
  Top Layer w6: v1(5035.43,2440.94) 5037.5,2443.01 U8.22@5037.5,2499.96
  Bottom Layer w6: Q3.6@4976.93,2175 4976.93,2362.76 4992.13,2377.95 5023.62,2377.95 5035.43,2389.76 v1(5035.43,2440.94)
A12: Q3.37 U8.23 | length 359.5
  Top Layer w6: Q3.37@4976.93,2175 4976.93,2354.88 4979.07,2354.88 5062.5,2438.31 ; 5062.5,2440.45 U8.23@5062.5,2499.96
A13: Q3.38 U8.20 | length 370.1
  Top Layer w6: Q3.38@4878.5,2175 4878.5,2327.32 4987.5,2436.32 U8.20@4987.5,2499.96
A14: Q3.39 U8.17 | length 412
  Top Layer w6: Q3.39@4780.08,2175 4780.08,2303.51 4791.34,2314.77 4846.27,2314.77 4912.5,2381 U8.17@4912.5,2499.96
A15: Q3.40 U8.14 | length 447.1
  Top Layer w6: Q3.40@4681.65,2175 4681.65,2307.45 4700.98,2326.77 4799.21,2326.77 4837.5,2365.06 U8.14@4837.5,2499.96
ASDO: U1.C1 U2.5 | length 489.4
  Top Layer w6: U2.5@4405.51,4185.24 4410.47,4185.24 4470.9,4124.81 4470.9,3985.79 4492.13,3964.57 v1@4614.17,3964.57 ; U1.C1@4655.75,3876.58 v1(4655.75,3923.47) v1@4657.48,3925.2
  Bottom Layer w6: v1@4614.17,3964.57 4618.11,3960.63 4618.58,3960.63 v1(4655.75,3923.47)
  other v1: 4616.17,3966.57
BA0: Q3.41 U8.12 | length 494.8
  Top Layer w6: Q3.41@4583.23,2175 4583.23,2319.26 4606.3,2342.33 4678.2,2342.33 4678.39,2342.52 4751.97,2342.52 4787.5,2378.05 U8.12@4787.5,2499.96
BA1: Q3.42 U8.9 | length 516
  Top Layer w6: Q3.42@4484.8,2175 4484.8,2331.07 4508.06,2354.33 4673.23,2354.33 4712.5,2393.6 U8.9@4712.5,2499.96
BA2: Q3.43 U8.6 | length 546.3
  Top Layer w6: Q3.43@4386.38,2175 4386.38,2347.01 4409.45,2370.08 4609.65,2370.08 4637.5,2397.93 U8.6@4637.5,2499.96
BA3: Q3.44 U8.3 | length 548.8
  Top Layer w6: Q3.44@4287.95,2175 4287.95,2319.45 4350.58,2382.08 4538.57,2382.08 4562.5,2406 U8.3@4562.5,2499.96
BA4: Q3.45 U9.23 | length 415.9
  Top Layer w6: Q3.45@4189.53,2175 4189.53,2331.07 4197.04,2338.58 4279.53,2338.58 4292.5,2351.56 U9.23@4292.5,2499.96
BA5: Q3.46 U9.20 | length 437.2
  Top Layer w6: Q3.46@4091.1,2175 4091.1,2342.88 4102.55,2354.33 4204.72,2354.33 4217.5,2367.11 U9.20@4217.5,2499.96
BA6: Q3.47 U9.17 | length 460.3
  Top Layer w6: Q3.47@3992.68,2175 3992.68,2357.87 4004.88,2370.08 4129.92,2370.08 4142.5,2382.66 U9.17@4142.5,2499.96
BA7: Q3.48 U9.14 | length 484.4
  Top Layer w6: Q3.48@3894.25,2175 3894.25,2370.63 3908.69,2385.07 4058.3,2385.07 4067.5,2394.27 U9.14@4067.5,2499.96
CART: Q3.49 U10.22 | length 504.6
  Top Layer w6: v1(3552.5,2446.2) U10.22@3552.5,2499.96 ; v3(3732.28,2374.01) 3748.08,2374.01 3795.83,2326.26 Q3.49@3795.83,2175
  Bottom Layer w6: v1@3551.18,2444.88 3618.1,2377.95 3728.33,2377.95 v3(3732.28,2374.01) v3@3738.05,2374.01
CIC1: Q3.24 U10.12 | length 399.5
  Top Layer w6: v1@3302.5,2394.34 U10.12@3302.5,2499.96
  Bottom Layer w6: Q3.24@3205.28,2175 3205.28,2354.88 3244.09,2393.7 v1(3303.14,2393.7)
CIC2: Q3.55 U10.20 | length 561.1
  Top Layer w6: Q3.55@3205.28,2175 3205.28,2327.32 3224.41,2346.46 3298.54,2346.46 3298.73,2346.65 3417.51,2346.65 3502.5,2431.63 U10.20@3502.5,2499.96
CIC6: Q3.56 U10.17 | length 601.9
  Top Layer w6: Q3.56@3106.85,2175 3106.85,2338.58 3126.91,2358.65 3376.53,2358.65 3427.5,2409.61 ; 3427.5,2411.73 U10.17@3427.5,2499.96
CIC7: Q3.25 U10.16 | length 600.2
  Top Layer w6: v1@3402.5,2414.31 U10.16@3402.5,2499.96
  Bottom Layer w6: Q3.25@3106.85,2175 3106.85,2378.5 3143.43,2415.09 3327.95,2415.09 3330.2,2412.83 3401.02,2412.83 v1(3401.57,2413.39)
CONFDONE: Q1.1 R7.1 U1.H14 | length 693.4
  Top Layer w6: U1.H14@4458.9,3364.76 v2(4478.58,3345.08)
  Bottom Layer w6: Q1.1@4403.54,2710.63 4468.5,2775.59 R7.1@4468.5,2870.08 4478.58,2880.16 v2(4478.58,3345.08)
CPUCLK: Q3.57 U10.14 | length 640.4
  Top Layer w6: Q3.57@3008.43,2175 3008.43,2347.01 3032.06,2370.65 3327.34,2370.65 3350.94,2394.25 U10.14@3350.94,2498.4
  Top Layer w10: U10.14@3350.94,2498.4 U10.14@3352.5,2499.96
D0: Q3.19 U9.11 | length 589.4
  Top Layer w6: v1@3992.5,2441.32 U9.11@3992.5,2499.96
  Bottom Layer w6: Q3.19@3697.4,2175 3697.4,2307.26 3707.2,2317.06 3950.92,2317.06 3992.13,2358.27 v1(3992.13,2440.94)
D1: Q3.20 U9.8 | length 618.2
  Top Layer w6: v1(3917.32,2440.94) 3917.5,2441.12 U9.8@3917.5,2499.96
  Bottom Layer w6: Q3.20@3598.98,2175 3598.98,2315.32 3612.76,2329.11 3888.16,2329.11 3917.32,2358.27 v1(3917.32,2440.94)
D2: Q3.21 U9.5 | length 638.6
  Top Layer w6: v4@3843.5,2445.86 U9.5@3843.5,2499.96
  Bottom Layer w6: Q3.21@3500.55,2175 3500.55,2315.51 3526.15,2341.11 3821.42,2341.11 3842.52,2362.2 v4(3842.52,2444.88)
D3: Q3.22 U9.2 | length 735
  Top Layer w6: v1(3708.66,2456.69) 3720.28,2445.07 3760.03,2445.07 3768.5,2453.54 U9.2@3768.5,2499.96
  Bottom Layer w6: Q3.22@3402.13,2175 3402.13,2295.83 3459.65,2353.35 3743.11,2353.35 3763.78,2374.02 3763.78,2401.57 v1(3708.66,2456.69)
D4: Q3.50 U9.12 | length 630.5
  Top Layer w6: Q3.50@3697.4,2175 3697.4,2382.44 3712.03,2397.07 4007.31,2397.07 4017.5,2407.26 U9.12@4017.5,2499.96
D5: Q3.51 U9.9 | length 628.7
  Top Layer w6: Q3.51@3598.98,2175 3598.98,2354.88 3653.17,2409.07 3928.76,2409.07 3940.02,2420.33 3940.02,2497.48 U9.9@3942.5,2499.96
D6: Q3.52 U9.6 | length 656.9
  Top Layer w6: Q3.52@3500.55,2175 3500.55,2378.56 3507.82,2385.83 3612.95,2385.83 3648.19,2421.07 3850.2,2421.07 3867.5,2438.37 U9.6@3867.5,2499.96
D7: Q3.53 U9.3 | length 625.8
  Top Layer w6: Q3.53@3402.13,2175 3402.13,2297.1 3506.41,2401.39 3606.11,2401.39 3637.8,2433.07 3775.59,2433.07 3792.5,2449.98 U9.3@3792.5,2499.96
DCLK: U1.H1 U2.6 | length 303
  Top Layer w6: U2.6@4405.51,4135.24 4443.5,4135.24 4458.9,4119.84 U1.H1@4458.9,3876.58
DDIR: R9.2 U1.F10 U9.1 | length 1757.9
  Top Layer w6: U9.1@3742.5,2499.96 v1(3742.5,2585.02) ; U1.F10@4537.64,3522.24 v2(4557.32,3502.56)
  Bottom Layer w6: R9.2@3708.66,2622.05 3742.5,2588.21 v1(3742.5,2585.02) 3818.9,2661.42 4303.15,2661.42 4354.33,2712.6 4354.33,3003.94 4373.64,3023.24 4424.5,3023.24 4459.08,3057.83 4459.08,3431.89 4470.51,3443.32 4486.29,3443.32 4498.45,3455.48 4498.45,3471.26 4509.88,3482.69 4537.45,3482.69 v2(4557.32,3502.56)
DQ0: U1.T15 U7.2 | length 1157.7
  Top Layer w6: U7.2@3082.68,3360.24 3082.68,3330.71 3166.11,3247.28 3968.7,3247.28 4046.82,3325.39 U1.T15@4143.94,3325.39
DQ1: U1.R14 U7.4 | length 1138.1
  Top Layer w6: U7.4@3145.67,3360.24 3145.67,3334.65 3221.04,3259.28 3963.73,3259.28 4049.53,3345.08 4163.62,3345.08 U1.R14@4183.31,3364.76
DQ2: U1.T14 U7.5 | length 1057.3
  Top Layer w6: U7.5@3177.17,3360.24 3177.17,3334.65 3240.54,3271.28 3958.76,3271.28 4052.25,3364.76 U1.T14@4143.94,3364.76
DQ3: U1.R13 U7.7 | length 1042.4
  Top Layer w6: U7.7@3240.16,3360.24 3240.16,3330.71 3287.59,3283.28 3953.79,3283.28 4054.96,3384.45 4163.62,3384.45 U1.R13@4183.31,3404.13
DQ4: U1.T13 U7.8 | length 961.6
  Top Layer w6: U7.8@3271.65,3360.24 3271.65,3330.71 3307.09,3295.28 3948.82,3295.28 4057.68,3404.13 U1.T13@4143.94,3404.13
DQ5: U1.P14 U7.10 | length 978.8
  Top Layer w6: v1(3334.65,3318.9) U7.10@3334.65,3360.24 ; v2(4202.99,3345.08) U1.P14@4222.68,3364.76
  Bottom Layer w6: v1@3338.56,3318.9 v1(3334.65,3318.9) 3367.65,3285.9 3945.37,3285.9 4005.93,3346.46 v2@4201.61,3346.46
DQ6: U1.N12 U7.11 | length 1022.1
  Top Layer w6: v1(3366.14,3318.9) U7.11@3366.14,3360.24 ; v2(4242.36,3423.82) U1.N12@4262.05,3443.5
  Bottom Layer w6: v1(3366.14,3318.9) 3387.14,3297.9 3940.4,3297.9 4085.44,3442.94 4223.24,3442.94 v2(4242.36,3423.82)
DQ7: U1.M11 U7.13 | length 987.9
  Top Layer w6: v1(3429.13,3318.9) U7.13@3429.13,3360.24 ; v2(4281.73,3463.19) U1.M11@4301.42,3482.87
  Bottom Layer w6: v1(3429.13,3318.9) 3436.82,3311.21 3936.74,3311.21 4088.72,3463.19 v2(4281.73,3463.19)
DQ8: U1.T9 U7.42 | length 830.7
  Top Layer w6: U7.42@3429.13,3805.12 3429.13,3779.53 3448.82,3759.84 3652.32,3759.84 3850.55,3561.61 U1.T9@4143.94,3561.61
DQ9: U1.R9 U7.44 | length 949.3
  Top Layer w6: U7.44@3366.14,3805.12 3366.14,3779.53 3397.83,3747.84 3645.67,3747.84 3851.58,3541.93 4163.62,3541.93 U1.R9@4183.31,3561.61
DQ10: U1.T10 U7.45 | length 941.5
  Top Layer w6: U7.45@3334.65,3805.12 3334.65,3779.53 3378.33,3735.84 3640.7,3735.84 3854.3,3522.24 U1.T10@4143.94,3522.24